# EAGLE board ESC (EAGLE 9.5.1)
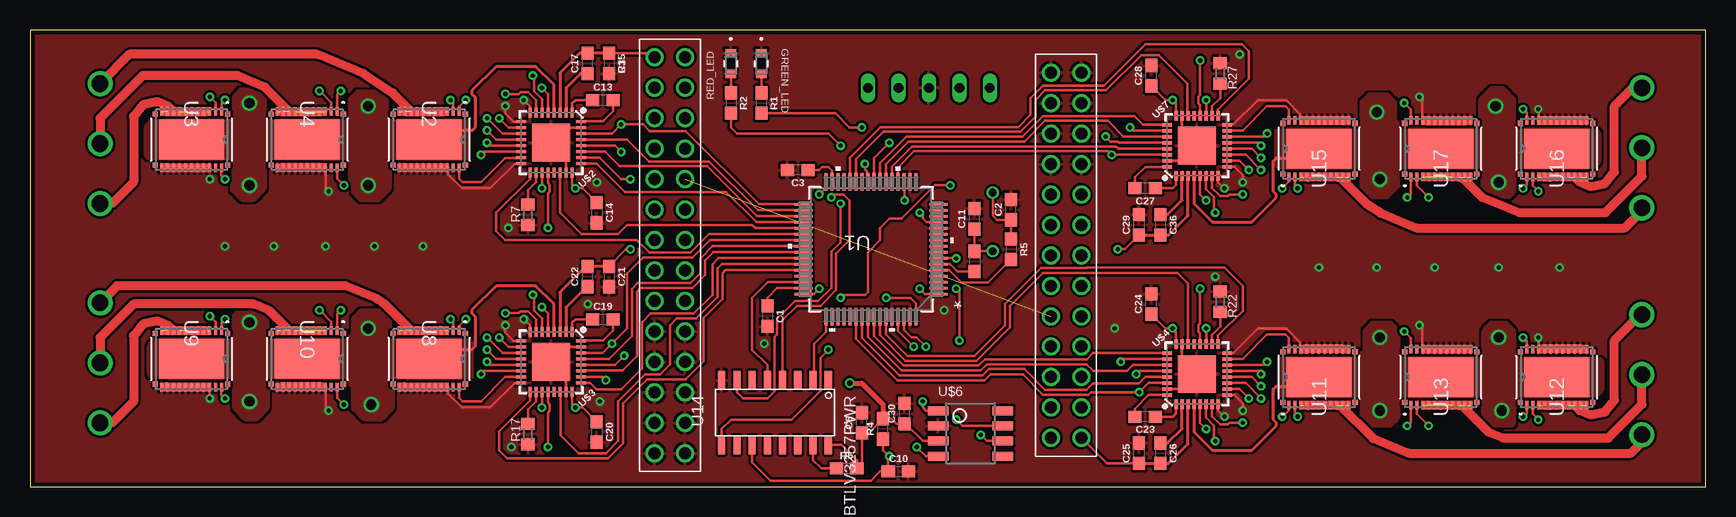
[diagram p0: board, top side]
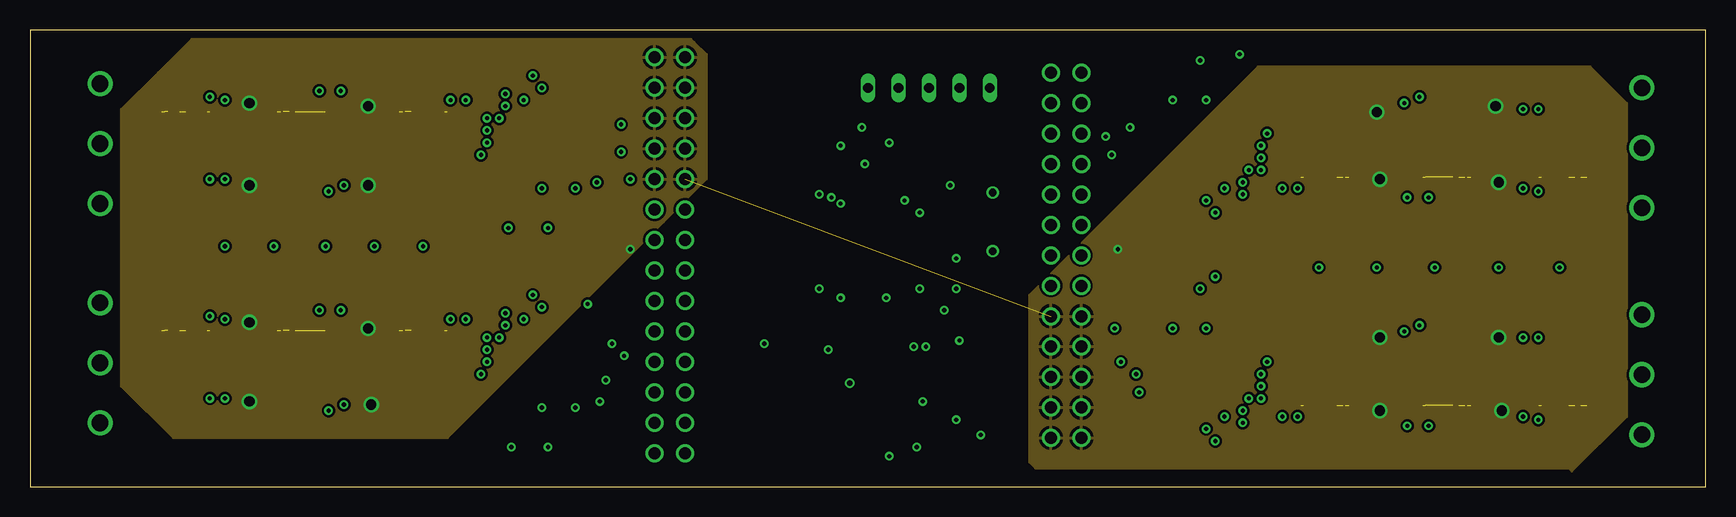
[diagram p1: board, inner layer Route2]
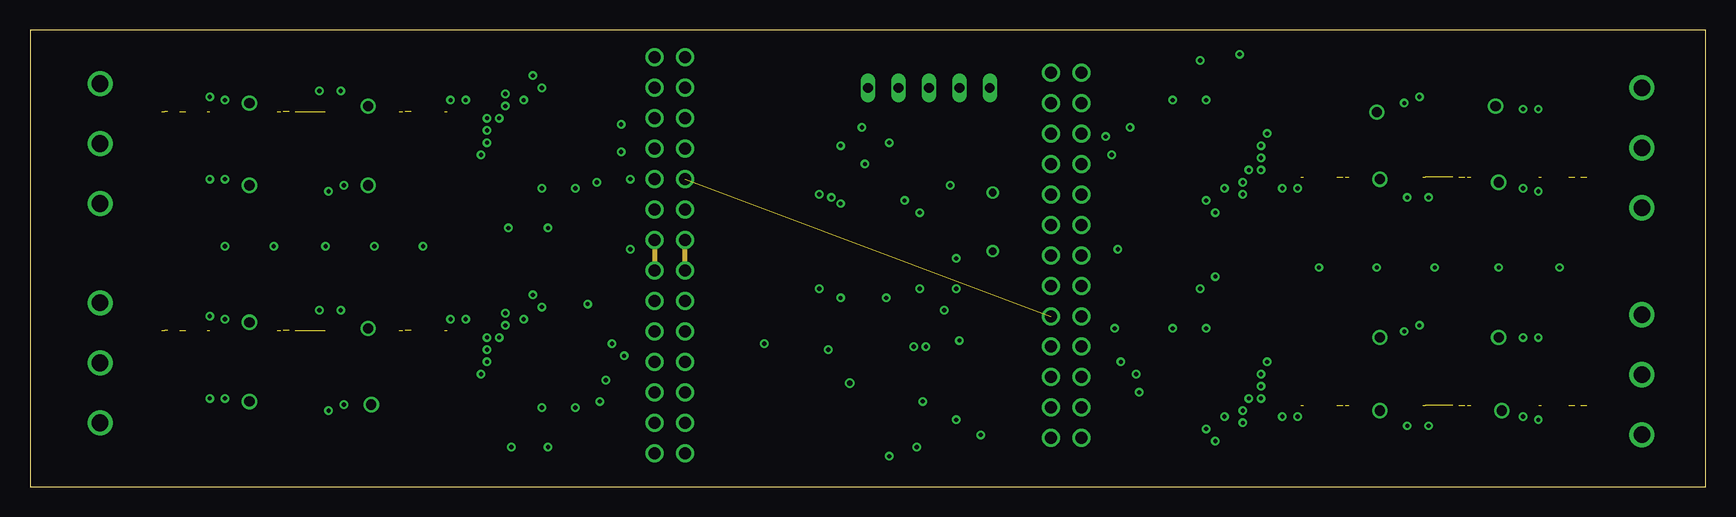
[diagram p2: board, inner layer Route15]
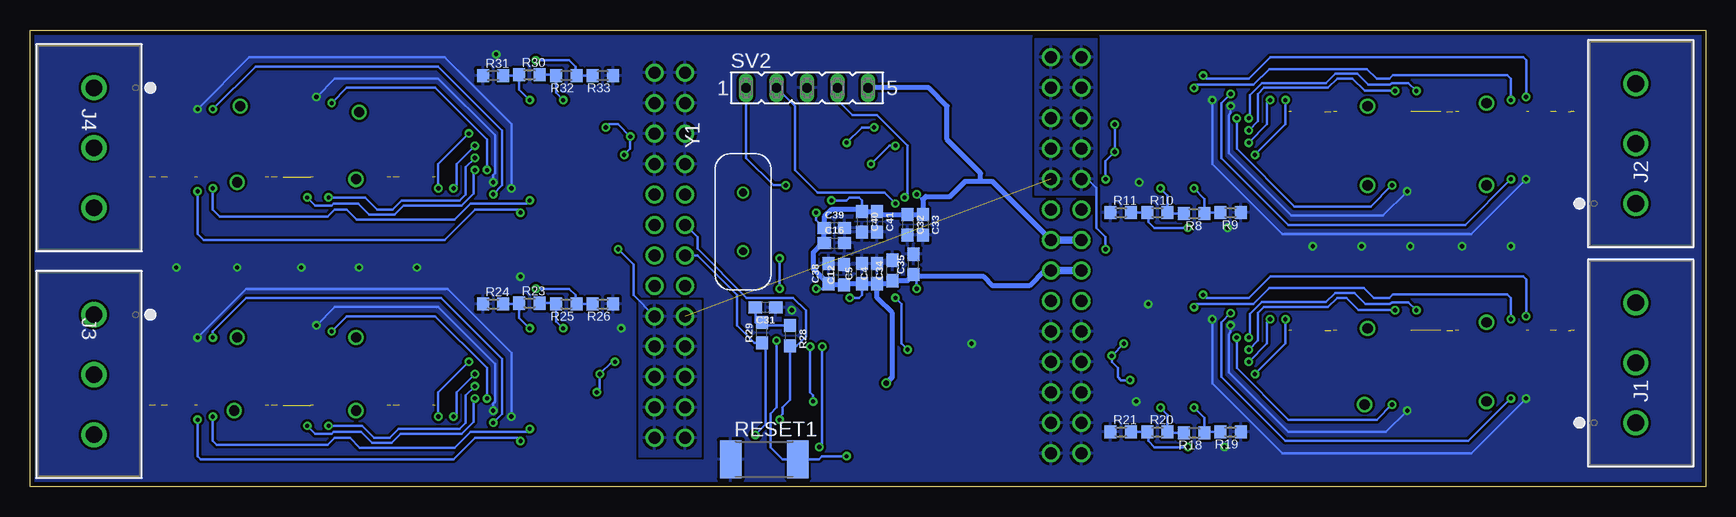
[diagram p3: board, bottom side, seen from below]

Size 139.7 x 38.1 mm. Coordinates in mm from the lower left corner, seen from the top.
Outline: 0,0 139.7,0 139.7,38.1 0,38.1 0,0
Copper layers (1+2*15+16): Top 0.0356mm / dielectric 1.5011mm / Route2 0.0356mm / dielectric 0.1499mm / Route15 0.0356mm / dielectric 0.2007mm / Bottom 0.0356mm
Design rules "ECE_Senior_Design *": minimum track width 8mil, minimum drill 13mil, track to track 8mil, track to pad 8mil, pad to pad 6mil, via to via 8mil, smd to smd 6mil, copper to edge 15mil, drill to drill 8mil, minimum pad ring 7mil, minimum via ring 7mil, stop-mask expansion 3mil, vias tented up to drill 0mil, thermal gap 10mil

## Footprints (pad centres in the part's own frame; a part is rotated, then mirrored left to right if it is on the bottom)
0603 = smd 1.1 x 1: 1 -0.85,0; 2 0.85,0
LED_VISHAY_TLMX1100 = smd 0.66 x 0.889: 1 -0.876,0; 2 0.876,0
CONN_1755529 = drill 1.397 pad 1.905: 1 0,0; 2 5.004,0; 3 10.008,0
R0603 = smd 1 x 1.1: 1 -0.85,0; 2 0.85,0
SW_2512 = smd 1.8 x 3.2: 1 -2.8,0; 2 2.8,0
FE05-1 = drill 0.813 long: 1 -5.08,0; 2 -2.54,0; 3 0,0; 4 2.54,0; 5 5.08,0
LQFP-64 = smd 1.473 x 0.229: 1 -5.626,3.75; 2 -5.626,3.25; 3 -5.626,2.75; 4 -5.626,2.25; 5 -5.626,1.75; 6 -5.626,1.25; 7 -5.626,0.75; 8 -5.626,0.25; 9 -5.626,-0.25; 10 -5.626,-0.75; 11 -5.626,-1.25; 12 -5.626,-1.75; 13 -5.626,-2.25; 14 -5.626,-2.75; 15 -5.626,-3.25; 16 -5.626,-3.75; 33 5.626,-3.75; 34 5.626,-3.25; 35 5.626,-2.75; 36 5.626,-2.25; 37 5.626,-1.75; 38 5.626,-1.25; 39 5.626,-0.75; 40 5.626,-0.25; 41 5.626,0.25; 42 5.626,0.75; 43 5.626,1.25; 44 5.626,1.75; 45 5.626,2.25; 46 5.626,2.75; 47 5.626,3.25; 48 5.626,3.75 | smd 0.229 x 1.473: 17 -3.75,-5.626; 18 -3.25,-5.626; 19 -2.75,-5.626; 20 -2.25,-5.626; 21 -1.75,-5.626; 22 -1.25,-5.626; 23 -0.75,-5.626; 24 -0.25,-5.626; 25 0.25,-5.626; 26 0.75,-5.626; 27 1.25,-5.626; 28 1.75,-5.626; 29 2.25,-5.626; 30 2.75,-5.626; 31 3.25,-5.626; 32 3.75,-5.626; 49 3.75,5.626; 50 3.25,5.626; 51 2.75,5.626; 52 2.25,5.626; 53 1.75,5.626; 54 1.25,5.626; 55 0.75,5.626; 56 0.25,5.626; 57 -0.25,5.626; 58 -0.75,5.626; 59 -1.25,5.626; 60 -1.75,5.626; 61 -2.25,5.626; 62 -2.75,5.626; 63 -3.25,5.626; 64 -3.75,5.626
DMM0022A = smd 0.711 x 0.254: 1 -2.35,2.5; 2 -2.35,2; 3 -2.35,1.5; 4 -2.35,1; 5 -2.35,0.5; 6 -2.35,0; 7 -2.35,-0.5; 8 -2.35,-1; 9 -2.35,-1.5; 10 -2.35,-2; 11 -2.35,-2.5; 12 2.35,-2.5; 13 2.35,-2; 14 2.35,-1.5; 15 2.35,-1; 16 2.35,-0.5; 17 2.35,0; 18 2.35,0.5; 19 2.35,1; 20 2.35,1.5; 21 2.35,2; 22 2.35,2.5 | smd 0.432 x 0.432: 23 -2.115,3.013; 24 -2.115,-3.013; 25 2.115,-3.013; 26 2.115,3.013 | smd 3.302 x 5.41: 27 0,0
SN74CBTLV3257PWR = smd 1.55 x 0.6: P$1 0,0; P$2 0,-1.27; P$3 0,-2.54; P$4 0,-3.81; P$5 0,-5.08; P$6 0,-6.35; P$7 0,-7.62; P$8 0,-8.89; P$9 5.4,-8.89; P$10 5.4,-7.62; P$11 5.4,-6.35; P$12 5.4,-5.08; P$13 5.4,-3.81; P$14 5.4,-2.54; P$15 5.4,-1.27; P$16 5.4,0
QFN-32-5X5MM = smd 0.285 x 0.8: 1 -1.75,-2.5; 2 -1.25,-2.5; 3 -0.75,-2.5; 4 -0.25,-2.5; 5 0.25,-2.5; 6 0.75,-2.5; 7 1.25,-2.5; 8 1.75,-2.5; 17 1.75,2.5; 18 1.25,2.5; 19 0.75,2.5; 20 0.25,2.5; 21 -0.25,2.5; 22 -0.75,2.5; 23 -1.25,2.5; 24 -1.75,2.5 | smd 0.8 x 0.285: 9 2.5,-1.75; 10 2.5,-1.25; 11 2.5,-0.75; 12 2.5,-0.25; 13 2.5,0.25; 14 2.5,0.75; 15 2.5,1.25; 16 2.5,1.75; 25 -2.5,1.75; 26 -2.5,1.25; 27 -2.5,0.75; 28 -2.5,0.25; 29 -2.5,-0.25; 30 -2.5,-0.75; 31 -2.5,-1.25; 32 -2.5,-1.75 | smd 3.15 x 3.15: EP 0,0
ESC2BACKPLANE_WHOLE = drill 1: P$1 1.27,31.75; P$2 3.81,31.75; P$3 6.35,31.75; P$4 8.89,31.75; P$5 11.43,31.75; P$6 13.97,31.75; P$7 16.51,31.75; P$8 19.05,31.75; P$9 21.59,31.75; P$10 24.13,31.75; P$11 26.67,31.75; P$12 29.21,31.75; P$13 31.75,31.75; P$15 1.27,34.29; P$16 3.81,34.29; P$17 6.35,34.29; P$18 8.89,34.29; P$19 11.43,34.29; P$20 13.97,34.29; P$21 16.51,34.29; P$22 19.05,34.29; P$23 21.59,34.29; P$24 24.13,34.29; P$25 26.67,34.29; P$26 29.21,34.29; P$27 31.75,34.29; P$A 0,-1.27; P$AA 30.48,1.27; P$B 2.54,-1.27; P$BB 33.02,1.27; P$C 5.08,-1.27; P$D 7.62,-1.27; P$E 10.16,-1.27; P$F 12.7,-1.27; P$G 15.24,-1.27; P$H 17.78,-1.27; P$I 20.32,-1.27; P$J 22.86,-1.27; P$K 25.4,-1.27; P$L 27.94,-1.27; P$M 30.48,-1.27; P$N 33.02,-1.27; P$O 0,1.27; P$P 2.54,1.27; P$Q 5.08,1.27; P$R 7.62,1.27; P$S 10.16,1.27; P$T 12.7,1.27; P$U 15.24,1.27; P$V 17.78,1.27; P$W 20.32,1.27; P$X 22.86,1.27; P$Y 25.4,1.27; P$Z 27.94,1.27
TCAN337D = smd 1.7 x 0.75: CANH 5.4,2.54; CANL 5.4,1.27; FAULT 5.4,0; GND 0,2.54; RXD 0,0; S 5.4,3.81; TXD 0,3.81; VCC 0,1.27
XTAL_ECS-80-S-4X = drill 0.63 pad 1.03: 1 -2.44,0; 2 2.44,0

## Placement (x,y rotation side)
C1  2.2uF  [0603]  61.47,14.22 270 top
C2  4.7uF  [0603]  81.79,23.11 90 top
C3  2.2uF  [0603]  64.01,26.42 180 top
C4  4.7uF  [0603]  69.09,17.78 90 bottom
C5  4.7uF  [0603]  70.36,17.78 90 bottom
C6  0.1uF  [0603]  69.34,5.33 90 top
C10  4.7uF  [0603]  72.39,1.27 0 top
C11  4.7uF  [0603]  78.74,22.35 90 top
C12  4.7uF  [0603]  71.86,17.68 90 bottom
C13  47nF  [0603]  47.75,32.26 0 top
C14  1.0uF  [0603]  47.24,22.86 270 top
C15  0.1uF  [0603]  48.26,35.31 270 top
C16  4.7uF  [0603]  72.64,20.32 0 bottom
C17  1.0uF  [0603]  46.48,35.31 90 top
C19  47nF  [0603]  47.75,13.97 0 top
C20  1.0uF  [0603]  47.24,4.57 270 top
C21  0.1uF  [0603]  48.26,17.53 270 top
C22  1.0uF  [0603]  46.48,17.53 90 top
C23  47nF  [0603]  92.96,5.84 180 top
C24  1.0uF  [0603]  93.47,15.24 90 top
C25  0.1uF  [0603]  92.46,2.79 90 top
C26  1.0uF  [0603]  94.23,2.79 270 top
C27  47nF  [0603]  92.96,24.89 180 top
C28  1.0uF  [0603]  93.47,34.29 90 top
C29  0.1uF  [0603]  92.46,21.84 90 top
C30  4.7uF  [0603]  72.9,6.1 90 top
C31  0.1uF  [0603]  78.38,14.96 180 bottom
C32  4.7uF  [0603]  66.55,21.84 270 bottom
C33  4.7uF  [0603]  65.28,21.84 270 bottom
C34  4.7uF  [0603]  67.82,18.03 90 bottom
C35  4.7uF  [0603]  66.04,18.54 90 bottom
C36  1.0uF  [0603]  94.23,21.84 270 top
C38  4.7uF  [0603]  73.15,17.78 90 bottom
C39  4.7uF  [0603]  72.64,21.59 0 bottom
C40  4.7uF  [0603]  70.36,22.1 270 bottom
C41  4.7uF  [0603]  69.09,22.1 270 bottom
GREEN_LED  TLMS1100-GS08  [LED_VISHAY_TLMX1100]  60.96,35.31 270 top
J1  1755529  [CONN_1755529]  5.84,5.33 90 bottom
J2  1755529  [CONN_1755529]  5.84,23.62 90 bottom
J3  1755529  [CONN_1755529]  134.37,14.35 270 bottom
J4  1755529  [CONN_1755529]  134.37,33.27 270 bottom
R1  1k  [0603]  60.96,32 270 top
R2  1k  [0603]  58.42,32 270 top
R3  1k  [0603]  78.74,18.8 270 top
R4  1k  [0603]  71.12,4.83 90 top
R5  1k  [0603]  81.79,19.81 270 top
R6  1.5k  [0603]  68.07,1.52 0 top
R7  47k  [R0603]  41.5,22.68 90 top
R8  [R0603]  42.65,22.78 180 bottom
R9  [R0603]  39.62,22.86 180 bottom
R10  [R0603]  45.72,22.86 0 bottom
R11  [R0603]  48.77,22.86 0 bottom
R17  47k  [R0603]  41.5,4.39 90 top
R18  [R0603]  42.65,4.5 180 bottom
R19  [R0603]  39.62,4.57 180 bottom
R20  [R0603]  45.72,4.57 0 bottom
R21  [R0603]  48.77,4.57 0 bottom
R22  47k  [R0603]  99.21,15.42 270 top
R23  [R0603]  98.07,15.32 0 bottom
R24  [R0603]  101.09,15.24 0 bottom
R25  [R0603]  95,15.24 180 bottom
R26  [R0603]  91.95,15.24 180 bottom
R27  47k  [R0603]  99.21,34.47 270 top
R28  60  [0603]  76.33,12.6 270 bottom
R29  60  [0603]  78.69,12.85 90 bottom
R30  [R0603]  98.07,34.37 0 bottom
R31  [R0603]  101.09,34.29 0 bottom
R32  [R0603]  95,34.29 180 bottom
R33  [R0603]  91.95,34.29 180 bottom
RED_LED  TLMS1100-GS08  [LED_VISHAY_TLMX1100]  58.42,35.31 270 top
RESET1  [SW_2512]  78.49,2.29 0 bottom
SV2  [FE05-1]  74.93,33.27 0 bottom
U1  STM32F405RGT6  [LQFP-64]  70.1,19.81 180 top
U2  CSD88584Q5DCT  [DMM0022A]  33.27,28.96 270 top
U3  CSD88584Q5DCT  [DMM0022A]  13.46,28.96 270 top
U4  CSD88584Q5DCT  [DMM0022A]  23.11,28.96 270 top
U8  CSD88584Q5DCT  [DMM0022A]  33.27,10.67 270 top
U9  CSD88584Q5DCT  [DMM0022A]  13.46,10.67 270 top
U10  CSD88584Q5DCT  [DMM0022A]  23.11,10.67 270 top
U11  CSD88584Q5DCT  [DMM0022A]  107.44,9.14 90 top
U12  CSD88584Q5DCT  [DMM0022A]  127.25,9.14 90 top
U13  CSD88584Q5DCT  [DMM0022A]  117.6,9.14 90 top
U14  SN74CBTLV3257PWR  [SN74CBTLV3257PWR]  66.55,8.89 270 top
U15  CSD88584Q5DCT  [DMM0022A]  107.44,28.19 90 top
U16  CSD88584Q5DCT  [DMM0022A]  127.25,28.19 90 top
U17  CSD88584Q5DCT  [DMM0022A]  117.6,28.19 90 top
U$2  DRV8320H  [QFN-32-5X5MM]  43.43,28.7 180 top
U$3  DRV8320H  [QFN-32-5X5MM]  43.43,10.41 180 top
U$4  DRV8320H  [QFN-32-5X5MM]  97.28,9.4 0 top
U$5  ESC2BACKPLANE  [ESC2BACKPLANE_WHOLE]  53.34,35.81 270 top
U$6  TCAN337D  [TCAN337D]  75.69,2.54 0 top
U$7  DRV8320H  [QFN-32-5X5MM]  97.28,28.45 0 top
Y1  ECS-80-S-4X  [XTAL_ECS-80-S-4X]  80.26,22.1 270 bottom

## Library data of the parts
C1 C3 = SparkFun-Capacitors; PROD_ID: CAP-07888
C2 C4 C5 C10-C12 C16 C30 C32-C35 C38-C41 = SparkFun-Capacitors; PROD_ID: CAP-08280
C6 C15 C21 C25 C29 C31 = SparkFun-Capacitors; PROD_ID: CAP-00810
C13 C19 C23 C27 = SparkFun-Capacitors; PROD_ID: CAP-08605
C14 C17 C20 C22 C24 C26 C28 C36 = SparkFun-Capacitors; PROD_ID: CAP-00868
GREEN_LED RED_LED = VESC_SHIT; MANUFACTURER_PART_NUMBER: TLMS1100GS08; VENDOR: Vishay
J1-J4 = VESC_SHIT; MANUFACTURER_PART_NUMBER: 1755529; VENDOR: Phoenix Contact
R1-R5 R28 R29 = SparkFun-Resistors; PROD_ID: RES-07856
R6 = SparkFun-Resistors; PROD_ID: RES-08306
R7-R11 R17-R27 R30-R33 = rcl; SPICEPREFIX: R
RESET1 = DiscreteComponents
SV2 = con-lsta; OC_FARNELL: unknown; OC_NEWARK: unknown
U1 = VESC_SHIT; MANUFACTURER_PART_NUMBER: STM32F405RGT6; VENDOR: STMicroelectronics
U2-U4 U8-U13 U15-U17 = VESC_SHIT; MANUFACTURER_PART_NUMBER: CSD88584Q5DCT; VENDOR: Texas Instruments
U14 = SN74CBTLV3257PWR
U$2-U$4 U$7 = VESC_SHIT
U$5 = ESC_to_Backplane_Connectors
U$6 = PI_Shield_Library
Y1 = ECS-80-S-4X; DESCRIPTION: Crystal 8MHz Series 2-Pin HC-49/U; DIGI-KEY_PART_NUMBER: X1057-ND; DIGI-KEY_PURCHASE_URL: https://www.digikey.com/product-detail/en/ecs-inc/ECS-80-S-4X/X1057-ND/827549?utm_source=snapeda&utm_medium=aggregator&utm_campaign=symbol; MF: ECS International; MP: ECS-80-S-4X; PACKAGE: HC-49/US ECS International

## Nets
+3V3: C4.1 C5.1 C6.1 C12.1 C16.1 C30.1 C32.1 C33.1 C34.1 C35.1 C38.1 C39.1 C40.1 C41.1 R4.2 R6.2 SV2.5 U1.1 U1.13 U1.19 U1.32 U1.48 U1.64 U14.P$16 U$5.P$G U$5.P$H U$5.P$U U$5.P$V U$6.VCC
+12V: C15.1 C17.2 C21.1 C22.2 C25.1 C26.2 C29.1 C36.2 U2.27 U3.27 U4.27 U8.27 U9.27 U10.27 U11.27 U12.27 U13.27 U15.27 U16.27 U17.27 U$2.3 U$2.4 U$3.3 U$3.4 U$4.3 U$4.4 U$5.P$9 U$5.P$10 U$5.P$11 U$5.P$12 U$5.P$13 U$5.P$23 U$5.P$24 U$5.P$25 U$5.P$26 U$5.P$27 U$5.P$A U$5.P$B U$5.P$C U$5.P$D U$5.P$E U$5.P$O U$5.P$P U$5.P$Q U$5.P$R U$5.P$S U$7.3 U$7.4
CAN_H: R28.2 U$5.P$6 U$6.CANH
CAN_L: R29.1 U$5.P$7 U$6.CANL
CAN_RX: U1.61 U$6.RXD
CAN_TX: U1.62 U$6.TXD
DVDD_1: C14.1 R8.2 R10.2 U$2.24
DVDD_2: C20.1 R18.2 R20.2 U$3.24
DVDD_3: C24.1 R23.2 R25.2 U$4.24
DVDD_4: C28.1 R30.2 R32.2 U$7.24
EN_1: U1.37 U$2.22
EN_2: U1.43 U$3.22
EN_3: U1.58 U$4.22
EN_4: U1.27 U$7.22
FAULT_1: U1.38 U$2.17
FAULT_2: U1.44 U$3.17
FAULT_3: U1.59 U$4.17
FAULT_4: U1.28 U$7.17
GHA_1: U3.1 U$2.5
GHA_2: U9.1 U$3.5
GHA_3: U12.1 U$4.5
GHA_4: U16.1 U$7.5
GHB_1: U4.1 U$2.12
GHB_2: U10.1 U$3.12
GHB_3: U13.1 U$4.12
GHB_4: U17.1 U$7.12
GHC_1: U2.1 U$2.13
GHC_2: U8.1 U$3.13
GHC_3: U11.1 U$4.13
GHC_4: U15.1 U$7.13
GLA_1: U3.22 U$2.7
GLA_2: U9.22 U$3.7
GLA_3: U12.22 U$4.7
GLA_4: U16.22 U$7.7
GLB_1: U4.22 U$2.10
GLB_2: U10.22 U$3.10
GLB_3: U13.22 U$4.10
GLB_4: U17.22 U$7.10
GLC_1: U2.22 U$2.15
GLC_2: U8.22 U$3.15
GLC_3: U11.22 U$4.15
GLC_4: U15.22 U$7.15
GND: C1.2 C2.2 C3.2 C4.2 C5.2 C6.2 C10.2 C11.2 C12.2 C14.2 C15.2 C16.2 C20.2 C21.2 C24.2 C25.2 C28.2 C29.2 C30.2 C31.1 C32.2 C33.2 C34.2 C35.2 C38.2 C39.2 C40.2 C41.2 GREEN_LED.1 R7.1 R9.1 R11.1 R17.1 R19.1 R21.1 R22.1 R24.1 R26.1 R27.1 R31.1 R33.1 RED_LED.1 RESET1.1 SV2.3 U1.12 U1.18 U1.60 U1.63 U2.12 U2.13 U2.14 U2.15 U2.16 U2.17 U2.18 U2.19 U2.20 U3.12 U3.13 U3.14 U3.15 U3.16 U3.17 U3.18 U3.19 U3.20 U4.12 U4.13 U4.14 U4.15 U4.16 U4.17 U4.18 U4.19 U4.20 U8.12 U8.13 U8.14 U8.15 U8.16 U8.17 U8.18 U8.19 U8.20 U9.12 U9.13 U9.14 U9.15 U9.16 U9.17 U9.18 U9.19 U9.20 U10.12 U10.13 U10.14 U10.15 U10.16 U10.17 U10.18 U10.19 U10.20 U11.12 U11.13 U11.14 U11.15 U11.16 U11.17 U11.18 U11.19 U11.20 U12.12 U12.13 U12.14 U12.15 U12.16 U12.17 U12.18 U12.19 U12.20 U13.12 U13.13 U13.14 U13.15 U13.16 U13.17 U13.18 U13.19 U13.20 U14.P$8 U15.12 U15.13 U15.14 U15.15 U15.16 U15.17 U15.18 U15.19 U15.20 U16.12 U16.13 U16.14 U16.15 U16.16 U16.17 U16.18 U16.19 U16.20 U17.12 U17.13 U17.14 U17.15 U17.16 U17.17 U17.18 U17.19 U17.20 U$2.8 U$2.9 U$2.16 U$2.23 U$2.31 U$2.EP U$3.8 U$3.9 U$3.16 U$3.23 U$3.31 U$3.EP U$4.8 U$4.9 U$4.16 U$4.23 U$4.31 U$4.EP U$5.P$1 U$5.P$2 U$5.P$3 U$5.P$4 U$5.P$15 U$5.P$16 U$5.P$17 U$5.P$18 U$5.P$AA U$5.P$BB U$5.P$J U$5.P$K U$5.P$L U$5.P$M U$5.P$N U$5.P$X U$5.P$Y U$5.P$Z U$6.GND U$7.8 U$7.9 U$7.16 U$7.23 U$7.31 U$7.EP
INHA_1: U1.36 U$2.25
INHA_2: U1.42 U$3.25
INHA_3: U1.57 U$4.25
INHA_4: U1.23 U$7.25
INHB_1: U1.35 U$2.27
INHB_2: U1.41 U$3.27
INHB_3: U1.56 U$4.27
INHB_4: U1.22 U$7.27
INHC_1: U1.34 U$2.29
INHC_2: U1.40 U$3.29
INHC_3: U1.55 U$4.29
INHC_4: U1.21 U$7.29
INL_1: U1.33 U$2.26 U$2.28 U$2.30
INL_2: U1.39 U$3.26 U$3.28 U$3.30
INL_3: U1.54 U$4.26 U$4.28 U$4.30
INL_4: U1.20 U$7.26 U$7.28 U$7.30
N$1: R1.2 U1.24
N$2: GREEN_LED.2 R1.1
N$3: R2.1 RED_LED.2
N$4: R2.2 U1.25
N$5: C1.1 U1.47
N$6: C3.1 U1.31
N$7: C11.1 R3.1 Y1.2
N$8: C2.1 R5.1 Y1.1
N$9: C13.1 U$2.1
N$10: R6.1 U14.P$15
N$11: R17.2 U$3.18
N$12: R22.2 U$4.18
N$13: R27.2 U$7.18
N$16: C13.2 U$2.32
N$17: R8.1 R9.2 U$2.19
N$18: R7.2 U$2.18
N$19: R10.1 R11.2 U$2.20
N$21: C22.1 U$3.2
N$22: C19.1 U$3.1
N$23: C19.2 U$3.32
N$24: R18.1 R19.2 U$3.19
N$26: R20.1 R21.2 U$3.20
N$27: C26.1 U$4.2
N$28: C23.1 U$4.1
N$29: C23.2 U$4.32
N$30: R23.1 R24.2 U$4.19
N$32: R25.1 R26.2 U$4.20
N$33: C36.1 U$7.2
N$34: C17.1 U$2.2
N$35: C27.1 U$7.1
N$36: C27.2 U$7.32
N$37: R30.1 R31.2 U$7.19
N$39: R32.1 R33.2 U$7.20
N$46: C31.2 R28.1 R29.2
NRST: C10.1 R4.1 RESET1.2 U1.7 U14.P$11
NRST_IN: SV2.1 U14.P$9
OSC_IN: R5.2 U1.5
OSC_OUT: R3.2 U1.6
PHASE_A1: J2.1 U3.3 U3.4 U3.5 U3.6 U3.7 U3.8 U3.9 U3.10 U3.11
PHASE_A2: J1.1 U9.3 U9.4 U9.5 U9.6 U9.7 U9.8 U9.9 U9.10 U9.11
PHASE_A3: J3.1 U12.3 U12.4 U12.5 U12.6 U12.7 U12.8 U12.9 U12.10 U12.11
PHASE_A4: J4.1 U16.3 U16.4 U16.5 U16.6 U16.7 U16.8 U16.9 U16.10 U16.11
PHASE_B1: J2.2 U4.3 U4.4 U4.5 U4.6 U4.7 U4.8 U4.9 U4.10 U4.11
PHASE_B2: J1.2 U10.3 U10.4 U10.5 U10.6 U10.7 U10.8 U10.9 U10.10 U10.11
PHASE_B3: J3.2 U13.3 U13.4 U13.5 U13.6 U13.7 U13.8 U13.9 U13.10 U13.11
PHASE_B4: J4.2 U17.3 U17.4 U17.5 U17.6 U17.7 U17.8 U17.9 U17.10 U17.11
PHASE_C1: J2.3 U2.3 U2.4 U2.5 U2.6 U2.7 U2.8 U2.9 U2.10 U2.11
PHASE_C2: J1.3 U8.3 U8.4 U8.5 U8.6 U8.7 U8.8 U8.9 U8.10 U8.11
PHASE_C3: J3.3 U11.3 U11.4 U11.5 U11.6 U11.7 U11.8 U11.9 U11.10 U11.11
PHASE_C4: J4.3 U15.3 U15.4 U15.5 U15.6 U15.7 U15.8 U15.9 U15.10 U15.11
PROG_SEL: U$5.P$5
S: U14.P$1
SHA_1: U3.2 U$2.6
SHA_2: U9.2 U$3.6
SHA_3: U12.2 U$4.6
SHA_4: U16.2 U$7.6
SHB_1: U4.2 U$2.11
SHB_2: U10.2 U$3.11
SHB_3: U13.2 U$4.11
SHB_4: U17.2 U$7.11
SHC_1: U2.2 U$2.14
SHC_2: U8.2 U$3.14
SHC_3: U11.2 U$4.14
SHC_4: U15.2 U$7.14
SWCLK: U1.49 U14.P$2
SWCLK_IN: SV2.4 U14.P$4
SWDIO: U1.46 U14.P$5
SWDIO_IN: SV2.2 U14.P$7

## Tracks (layer width: path | path; a pad name or v marks a point on that pad's centre or on a via)
+3V3  (via drill 0.35, 0.45)
  Top 0.203: v72.9,23.88 72.9,25.39 U1.19 | v65.79,24.38 66.35,24.95 U1.32 | v65.79,16.51 65.34,16.06 U1.48 | U14.P$16 67.63,3.49 68.92,2.2 R6.2 69.09,1.52 69.34,1.78 C6.1 69.93,4.48 R4.2 71.79,5.68 72.22,5.25 C30.1 72.99,5.25 74.42,3.81 U$6.VCC | U1.64 73.85,15.3 73.41,15.75 v71.37,15.75 | v74.17,22.86 74.42,22.61 74.42,22.35 74.71,22.06 U1.13 | U1.1 74.62,16.06 v74.17,16.51
  Top 0.406: v68.33,8.64 69.34,8.64 71.12,6.86 R4.2
  Route15 0.406: U$5.P$G U$5.P$H | U$5.P$V U$5.P$U
  Bottom 0.203: v65.79,24.38 65.28,23.88 C33.1 | C40.1 70.36,23.88 70.61,24.13 71.37,24.13 71.63,23.88 v72.9,23.88 | C39.1 74.17,22.26 v74.17,22.86 | C5.1 70.36,16 70.61,15.75 v71.37,15.75 | C38.1 73.57,16.51 v74.17,16.51 | C35.1 65.79,17.44 v65.79,16.51
  Bottom 0.406: U$5.P$U 59.52,25.49 60.45,25.49 | 60.45,25.49 61.72,25.49 62.99,24.22 65.02,24.22 65.28,23.96 C33.1 C32.1 68.83,22.69 C41.1 C40.1 70.52,23.11 72.9,23.11 73.49,22.52 C39.1 C16.1 73.66,20.32 74.42,19.56 74.42,18.2 C38.1 73.05,16.83 C12.1 71.75,16.93 C5.1 C4.1 | C4.1 68.07,16.93 C34.1 66.55,17.18 C35.1 65.87,17.53 60.2,17.53 59.44,16.76 56.39,16.76 55.12,18.03 U$5.P$V | v68.33,8.64 67.82,9.14 67.82,14.48 69.09,15.75 C4.1 | 60.45,25.49 60.45,26.16 63.25,28.96 63.25,31.75 64.77,33.27 SV2.5
  Bottom 0.61: U$5.P$G U$5.P$U | U$5.P$V U$5.P$H
+12V  (via drill 0.35, 0.85)  (1 unrouted)
  Top 0.203: C15.1 51.73,36.16 U$5.P$A | v50.04,19.81 49.7,19.81 C21.1 | C29.1 91.27,19.81 v90.68,19.81 | C25.1 89.75,1.94 U$5.P$27
  Top 0.254: C29.1 C36.2 94.91,20.99 96.53,22.62 U$7.3 | U$7.4 97.03,23.62 98.55,22.1 101.85,22.1 103.89,24.13 103.89,24.38 103.63,24.64 103.63,27.18 103.89,27.43 106.68,27.43 U15.27 | C25.1 C26.2 94.91,1.94 96.53,3.57 U$4.3 | U$4.4 97.03,4.57 98.55,3.05 101.85,3.05 103.89,5.08 103.89,5.33 103.63,5.59 103.63,8.13 103.89,8.38 106.68,8.38 U11.27 | C21.1 C22.2 46.32,18.38 44.18,16.24 U$3.3 | U$3.4 43.68,15.24 42.16,16.76 38.86,16.76 36.83,14.73 36.83,14.48 37.08,14.22 37.08,11.68 36.83,11.43 34.04,11.43 U8.27 | C15.1 C17.2 45.81,36.16 44.18,34.53 U$2.3 | U$2.4 43.68,33.53 42.16,35.05 38.86,35.05 36.83,33.02 36.83,32.77 37.08,32.51 37.08,29.97 36.83,29.72 34.04,29.72 U2.27
  Bottom 0.203: v50.04,19.81 50.04,20.83 50.8,21.59 50.8,24.89 51.56,25.65 U$5.P$E | v90.68,19.81 89.41,18.54 89.41,16 U$5.P$23
  other vias: 18.29,25.15 28.19,25.15 28.19,31.75 18.29,32 18.29,13.72 18.29,7.11 28.45,6.86 28.19,13.21 112.52,6.35 122.68,6.35 112.52,12.45 122.43,12.45 112.52,25.65 122.43,25.4 122.17,31.75 112.27,31.24
  pour Bottom: 83.82,2.54 83.82,15.49 88.9,15.49 88.9,2.54
  pour Bottom: 50.8,37.34 55.88,37.34 55.88,24.64 55.88,24.38 50.8,24.38
  pour Route2: 56.39,31.24 56.39,25.65 52.83,22.1 34.8,4.06 12.19,4.06 11.94,4.06 7.62,8.38 7.62,31.5 10.67,34.54 13.46,37.34 51.31,37.34 55.12,37.34 55.37,37.08 56.39,36.07
  pour Route2: 84.07,1.52 128.27,1.52 128.52,1.27 133.1,5.84 133.1,8.13 133.1,32 130.05,35.05 102.36,35.05 83.31,16 83.31,2.03 83.82,1.52
  pour Top (no thermals): 18.54,24.13 17.78,24.13 17.02,24.89 17.02,26.67 16.76,26.92 16.51,26.92 16.26,27.18 10.41,27.18 9.91,27.69 9.91,29.97 10.67,30.73 16.76,30.73 17.27,31.24 17.27,32.51 17.78,33.02 19.05,33.02 19.3,32.77 19.3,31.24 20.07,30.48 26.42,30.48 26.92,30.99 26.92,32.26 27.43,32.77 28.96,32.77 29.46,32.26 29.46,30.99 29.72,30.73 35.81,30.73 36.32,30.23 36.32,27.43 36.07,27.18 29.97,27.18 29.72,26.92 29.72,24.89 28.96,24.13 27.69,24.13 26.92,24.89 26.92,26.67 26.42,27.18 19.81,27.18 19.3,26.67 19.3,24.89
  pour Top (no thermals): 18.8,5.84 18.03,5.84 17.27,6.6 17.27,8.38 17.02,8.64 16.76,8.64 16.51,8.89 10.67,8.89 10.16,9.4 10.16,11.68 10.92,12.45 17.02,12.45 17.02,13.97 17.78,14.73 18.54,14.73 19.56,13.72 19.56,12.95 20.32,12.19 26.67,12.19 27.18,12.7 27.18,13.97 27.69,14.48 29.21,14.48 29.72,13.97 29.72,12.7 29.97,12.45 36.07,12.45 36.58,11.94 36.58,9.14 36.32,8.89 30.23,8.89 29.97,8.64 29.97,6.6 29.21,5.84 27.94,5.84 27.18,6.6 27.18,8.38 26.67,8.89 20.07,8.89 19.56,8.38 19.56,6.6
  pour Top (no thermals): 121.92,33.02 122.68,33.02 123.44,32.26 123.44,30.48 123.7,30.23 123.95,30.23 124.21,29.97 130.05,29.97 130.56,29.46 130.56,27.18 129.79,26.42 123.7,26.42 123.7,24.89 123.19,24.38 121.92,24.38 121.16,25.15 121.16,25.91 120.65,26.42 114.05,26.42 113.79,26.16 113.79,25.15 113.03,24.38 111.76,24.38 111.25,24.89 111.25,25.91 110.74,26.42 104.65,26.42 104.14,26.92 104.14,29.72 104.39,29.97 111,29.97 111.25,30.23 111.25,32 111.76,32.51 113.03,32.51 113.54,32 113.54,30.48 114.05,29.97 120.65,29.97 121.16,30.48 121.16,32.26
  pour Top (no thermals): 121.92,13.46 122.94,13.46 123.7,12.7 123.7,11.43 123.95,11.18 124.21,11.18 124.46,10.92 130.3,10.92 130.81,10.41 130.81,8.13 130.05,7.37 123.95,7.37 123.95,5.84 123.44,5.33 122.17,5.33 121.41,6.1 121.41,6.86 120.9,7.37 114.05,7.37 113.79,7.11 113.79,5.84 113.28,5.33 111.76,5.33 111.25,5.84 111.25,7.11 111,7.37 104.9,7.37 104.39,7.87 104.39,10.67 104.65,10.92 111.25,10.92 111.51,11.18 111.51,12.95 112.01,13.46 113.28,13.46 113.79,12.95 113.79,11.43 114.3,10.92 120.9,10.92 121.41,11.43 121.41,12.95
CAN_H  (via drill 0.35)
  Top 0.203: U$6.CANH 77.72,5.08 v77.22,5.59
  Bottom 0.203: v77.22,5.59 77.22,5.84 76.96,6.1 76.96,6.6 76.33,7.24 R28.2 75.78,11.75 75.01,12.52 75.01,14.68 76.1,15.77 79.96,15.77 84.07,19.88 84.07,20.83 U$5.P$6
CAN_L  (via drill 0.35)
  Top 0.203: U$6.CANL 79.76,3.81 v79.25,4.32
  Bottom 0.203: v79.25,4.32 78.38,5.18 78.38,11.7 R29.1 79.31,12 80.77,13.46 80.77,16 84.07,19.3 U$5.P$7
CAN_RX  (via drill 0.35)
  Top 0.203: U1.61 72.35,12.99 v73.66,11.68 | U$6.RXD 74.68,2.54 v73.91,3.3
  Bottom 0.203: v73.66,11.68 73.66,3.56 v73.91,3.3
CAN_TX  (via drill 0.35)
  Top 0.203: U$6.TXD 74.68,6.35 74.42,6.6 v74.42,7.11 | U1.62 72.85,13.06 73.47,12.45 73.91,12.45 v74.68,11.68
  Bottom 0.203: v74.42,7.11 74.42,7.62 74.68,7.87 v74.68,11.68
DVDD_1  (via drill 0.35)
  Top 0.203: C14.1 46.06,24.89 v45.47,24.89 45.18,25.17 U$2.24
  Bottom 0.203: R8.2 44.79,22.78 R10.2 44.87,24.3 v45.47,24.89
DVDD_2  (via drill 0.35)
  Top 0.203: C20.1 46.06,6.6 v45.47,6.6 45.18,6.89 U$3.24
  Bottom 0.203: R18.2 44.79,4.5 R20.2 44.87,6.01 v45.47,6.6
DVDD_3  (via drill 0.35)
  Top 0.203: C24.1 94.65,13.21 v95.25,13.21 95.53,12.93 U$4.24
  Bottom 0.203: R23.2 95.92,15.32 R25.2 95.85,13.8 v95.25,13.21
DVDD_4  (via drill 0.35)
  Top 0.203: C28.1 94.65,32.26 v95.25,32.26 95.53,31.98 U$7.24
  Bottom 0.203: R30.2 95.92,34.37 R32.2 95.85,32.85 v95.25,32.26
EN_1
  Top 0.203: U$2.22 44.2,26.19 44.2,22.86 45.97,21.08 49.02,21.08 49.78,21.84 60.19,21.84 60.47,21.56 U1.37
EN_2
  Top 0.203: U$3.22 44.24,7.86 44.24,4.28 45.72,2.79 48.01,2.79 49.02,3.81 49.02,7.11 51.27,9.36 52.51,9.36 53.34,10.19 53.34,13.46 53.91,14.03 55.5,14.03 57.3,15.83 57.3,18.19 57.68,18.56 U1.43
EN_3
  Top 0.203: U$4.22 96.53,16.94 95.65,17.82 84.43,17.82 81.69,15.07 81.69,13.29 78.91,10.52 72.98,10.52 70.85,12.64 U1.58
EN_4
  Top 0.203: U$7.22 96.48,31 96.48,33.61 94.1,35.99 92.64,35.99 89.7,33.06 84.62,33.06 83.82,32.26 83.82,30.87 82.56,29.6 71.13,29.6 68.85,27.33 U1.27
FAULT_1
  Top 0.203: U$2.17 41.68,25.68 38.86,22.86 38.86,21.34 39.62,20.57 50.58,20.57 51.63,19.52 55.08,19.52 56.62,21.06 U1.38
FAULT_2
  Top 0.203: U$3.17 41.68,7.21 39.12,4.64 39.12,3.05 39.78,2.39 48.17,2.39 49.43,3.64 49.43,6.94 51.44,8.95 54.64,8.95 56.13,10.45 56.13,14.09 57.71,15.66 57.71,17.78 57.99,18.06 U1.44
FAULT_3
  Top 0.203: U$4.17 99.03,12.61 101.09,14.66 101.09,16.76 99.57,18.29 88.11,18.29 88.07,18.25 84.29,18.25 81.28,15.24 81.28,13.46 78.74,10.92 73.15,10.92 71.35,12.72 U1.59
FAULT_4
  Top 0.203: U$7.17 99.03,31.46 101.6,34.02 101.6,36.32 101.01,36.91 92.98,36.91 89.53,33.47 84.45,33.47 83.41,32.43 83.41,31.04 82.39,30.01 70.91,30.01 68.35,27.46 U1.28
GHA_1  (via drill 0.35)
  Top 0.203: U$2.5 43.18,32.76 v42.67,33.27 | U3.1 15.96,31.96 v16.26,32.26
  Bottom 0.203: v42.67,33.27 42.42,33.53 37.73,33.53 36.41,34.85 28.25,34.85 27.43,34.04 26.4,34.04 26.09,34.34 16.56,34.34 16.26,34.04 v16.26,32.26
GHA_2  (via drill 0.35)
  Top 0.203: U$3.5 43.18,14.47 v42.67,14.99 | U9.1 15.96,13.68 v16.26,13.97
  Bottom 0.203: v42.67,14.99 42.42,15.24 37.73,15.24 36.41,16.56 28.5,16.56 27.69,15.75 26.4,15.75 26.09,16.05 16.56,16.05 16.26,15.75 v16.26,13.97
GHA_3  (via drill 0.35)
  Top 0.203: U$4.5 97.53,5.34 v98.04,4.83 | U12.1 124.75,6.14 v124.46,5.84
  Bottom 0.203: v98.04,4.83 98.3,4.57 102.99,4.57 104.31,3.25 112.22,3.25 113.03,4.06 114.32,4.06 114.88,3.51 124.16,3.51 124.46,3.81 v124.46,5.84
GHA_4  (via drill 0.35)
  Top 0.203: U$7.5 97.53,24.39 v98.04,23.88 | U16.1 124.75,25.19 v124.46,24.89
  Bottom 0.203: v98.04,23.88 98.3,23.62 102.99,23.62 104.31,22.3 112.47,22.3 113.28,23.11 114.32,23.11 114.88,22.56 123.9,22.56 124.46,23.11 v124.46,24.89
GHB_1  (via drill 0.35)
  Top 0.203: U$2.12 38.87,28.95 v38.1,29.72 | v25.91,33.02 25.61,32.72 25.61,32.71 U4.1
  Bottom 0.203: v38.1,29.72 37.34,30.48 37.34,32.77 36.83,33.27 31.5,33.27 30.73,34.04 29.46,34.04 28.45,33.02 v25.91,33.02
GHB_2  (via drill 0.35)
  Top 0.203: v25.91,14.73 25.61,14.43 U10.1 | U$3.12 38.87,10.66 v38.1,11.43
  Bottom 0.203: v38.1,11.43 37.34,12.19 37.34,14.48 36.83,14.99 31.5,14.99 30.73,15.75 29.97,15.75 28.96,14.73 v25.91,14.73
GHB_3  (via drill 0.35)
  Top 0.203: v114.81,5.08 115.11,5.38 115.11,6.02 115.1,6.03 U13.1 | U$4.12 101.85,9.15 v102.62,8.38
  Bottom 0.203: v102.62,8.38 103.38,7.62 103.38,5.33 103.89,4.83 108.97,4.83 109.73,4.06 111,4.06 112.01,5.08 v114.81,5.08
GHB_4  (via drill 0.35)
  Top 0.203: v114.81,24.13 115.11,24.43 U17.1 | U$7.12 101.85,28.2 v102.62,27.43
  Bottom 0.203: v102.62,27.43 103.38,26.67 103.38,24.38 103.89,23.88 108.71,23.88 109.47,23.11 110.74,23.11 111.76,24.13 v114.81,24.13
GHC_1  (via drill 0.35)
  Top 0.203: U$2.13 38.35,28.45 v38.1,28.7 | U2.1 35.77,31.71 v36.32,32.26
  Bottom 0.203: v38.1,28.7 36.58,30.23 36.58,32 v36.32,32.26
GHC_2  (via drill 0.35)
  Top 0.203: U$3.13 38.35,10.16 v38.1,10.41 | U8.1 35.77,13.42 v36.32,13.97
  Bottom 0.203: v38.1,10.41 36.58,11.94 36.58,13.72 v36.32,13.97
GHC_3  (via drill 0.35)
  Top 0.203: U$4.13 102.36,9.65 v102.62,9.4 | U11.1 104.94,6.39 v104.39,5.84
  Bottom 0.203: v102.62,9.4 104.14,7.87 104.14,6.1 v104.39,5.84
GHC_4  (via drill 0.35)
  Top 0.203: U$7.13 102.36,28.7 v102.62,28.45 | U15.1 104.94,25.44 v104.39,24.89
  Bottom 0.203: v102.62,28.45 104.14,26.92 104.14,25.15 v104.39,24.89
GLA_1  (via drill 0.35)
  Top 0.203: U$2.7 42.18,32.24 41.51,32.92 40.88,32.92 40.73,32.77 v39.62,32.77 | v16.26,25.65 15.95,25.96 U3.22
  Bottom 0.203: v39.62,32.77 40.39,32 40.39,27.43 34.8,21.84 20.07,21.84 v16.26,25.65
GLA_2  (via drill 0.35)
  Top 0.203: U$3.7 42.18,13.95 41.51,14.63 40.88,14.63 40.73,14.48 v39.62,14.48 | v16.26,7.37 15.95,7.67 U9.22
  Bottom 0.203: v39.62,14.48 40.39,13.72 40.39,9.14 35.05,3.81 19.81,3.81 v16.26,7.37
GLA_3  (via drill 0.35)
  Top 0.203: U$4.7 98.53,5.86 99.21,5.18 99.84,5.18 99.99,5.33 v101.09,5.33 | v124.46,12.45 124.76,12.14 124.76,11.49 U12.22
  Bottom 0.203: v101.09,5.33 100.33,6.1 100.33,10.67 105.41,15.75 121.67,15.75 124.46,12.95 v124.46,12.45
GLA_4  (via drill 0.35)
  Top 0.203: U$7.7 98.53,24.91 99.21,24.23 99.84,24.23 99.99,24.38 v101.09,24.38 | v124.46,31.5 124.76,31.19 124.76,30.54 U16.22
  Bottom 0.203: v101.09,24.38 100.33,25.15 100.33,29.72 105.66,35.05 120.9,35.05 v124.46,31.5
GLB_1  (via drill 0.35)
  Top 0.203: U$2.10 39.9,29.95 v39.12,30.73 | v26.16,25.15 25.61,25.7 25.61,25.71 U4.22
  Bottom 0.203: v39.12,30.73 39.12,28.19 34.29,23.37 27.94,23.37 v26.16,25.15
GLB_2  (via drill 0.35)
  Top 0.203: U$3.10 39.9,11.66 v39.12,12.45 | v26.16,6.86 25.61,7.41 25.61,7.42 U10.22
  Bottom 0.203: v39.12,12.45 39.12,9.91 34.8,5.59 27.43,5.59 v26.16,6.86
GLB_3  (via drill 0.35)
  Top 0.203: U$4.10 100.82,8.15 v101.6,7.37 | v114.55,12.95 115.11,12.4 115.11,12 115.1,11.99 U13.22
  Bottom 0.203: v101.6,7.37 101.6,9.91 105.92,14.22 113.28,14.22 v114.55,12.95
GLB_4  (via drill 0.35)
  Top 0.203: U$7.10 100.82,27.2 v101.6,26.42 | v114.55,32 115.11,31.45 115.11,31.05 115.1,31.04 U17.22
  Bottom 0.203: v101.6,26.42 101.6,28.96 105.92,33.27 113.28,33.27 v114.55,32
GLC_1
  Top 0.203: U$2.15 40.91,27.43 39.62,27.43 37.59,25.4 36.07,25.4 35.77,25.69 U2.22
GLC_2
  Top 0.203: U$3.15 40.91,9.14 39.62,9.14 37.59,7.11 36.07,7.11 35.77,7.41 U8.22
GLC_3
  Top 0.203: U$4.15 99.8,10.67 101.09,10.67 103.12,12.7 104.65,12.7 104.95,12.4 104.94,12.39 U11.22
GLC_4
  Top 0.203: U$7.15 99.8,29.72 101.09,29.72 103.12,31.75 104.65,31.75 104.95,31.45 104.95,31.05 104.94,31.04 U15.22
GND  (via drill 0.35)
  Top 0.203: U$2.8 41.68,31.72 v41.15,32.26 | v14.99,25.65 14.96,25.68 | U$2.9 40.33,30.45 39.62,31.16 v39.62,31.75 | v24.89,24.64 24.64,24.89 24.64,26.42 24.45,26.61 23.62,26.61 | U$2.16 40.91,26.92 40.39,26.92 38.35,24.89 36,24.89 34.84,26.05 34.84,26.54 | U$3.8 41.68,13.43 v41.15,13.97 | v14.99,7.37 14.96,7.39 U9.20 | U$3.9 40.33,12.16 39.62,12.87 v39.62,13.46 | v24.89,6.35 24.64,6.6 24.64,8.13 24.45,8.32 23.62,8.32 | U$3.16 40.91,8.64 40.39,8.64 38.35,6.6 36,6.6 34.84,7.76 34.84,8.25 U8.20 | U$4.8 99.03,6.38 v99.57,5.84 | v125.73,12.45 125.75,12.42 U12.20 | U$4.9 100.39,7.65 101.09,6.94 v101.09,6.35 | v115.82,13.46 116.08,13.21 116.08,11.68 116.27,11.49 U13.18 | U$4.16 99.81,11.18 100.33,11.18 102.36,13.21 104.72,13.21 105.87,12.05 105.87,11.56 U11.20 | U$7.8 99.03,25.43 v99.57,24.89 | v125.73,31.5 125.75,31.47 U16.20 | U$7.9 100.39,26.7 101.09,25.99 v101.09,25.4 | v115.82,32.51 116.08,32.26 116.08,30.73 116.27,30.54 U17.18 | U$7.16 99.81,30.23 100.33,30.23 102.36,32.26 104.72,32.26 105.87,31.1 105.87,30.61 U15.20 | U$2.31 44.68,29.95 U$2.EP 43.69,28.7 44.7,27.69 44.68,27.67 U$2.23 | U$3.31 44.47,11.66 44.45,11.68 43.43,10.67 U$3.EP 43.69,10.41 44.7,9.4 44.68,9.38 U$3.23 | U$4.31 96.25,8.15 96.27,8.13 97.28,9.14 U$4.EP 97.03,9.4 96.01,10.41 96.03,10.43 U$4.23 | U$7.23 96.03,29.74 96.01,29.72 U$7.EP 96.01,27.18 95.99,27.2 U$7.31
  Top 0.762: 14.75,26.61 U3.13 11.25,26.61 | 20.9,26.61 U4.13 U4.14 U4.15 U4.16 U4.17 U4.18 | 34.56,26.61 U2.13 31.06,26.61 | 24.4,26.61 23.62,26.61 | 14.75,8.32 U9.13 11.25,8.32 | 24.4,8.32 23.62,8.32 U10.13 20.9,8.32 | 34.56,8.32 U8.13 31.06,8.32 | 125.97,11.49 U12.13 129.47,11.49 | 116.31,11.49 U13.18 U13.13 119.81,11.49 | 106.15,11.49 U11.13 109.66,11.49 | 125.97,30.54 U16.13 129.47,30.54 | 116.31,30.54 U17.18 U17.13 119.81,30.54 | 106.15,30.54 U15.13 109.66,30.54
  Bottom 0.203: v41.15,32.26 41.15,26.92 35.31,21.08 19.56,21.08 v14.99,25.65 | v39.62,31.75 39.62,31.16 39.77,31.01 39.77,27.84 34.54,22.61 26.92,22.61 v24.89,24.64 | v41.15,13.97 41.15,8.64 35.31,2.79 19.56,2.79 v14.99,7.37 | v39.62,13.46 39.62,12.87 39.77,12.72 39.77,9.55 34.8,4.57 26.67,4.57 v24.89,6.35 | v99.57,5.84 99.57,11.18 104.9,16.51 121.67,16.51 v125.73,12.45 | v101.09,6.35 101.09,6.94 100.94,7.09 100.94,10.26 105.66,14.99 114.3,14.99 v115.82,13.46 | v99.57,24.89 99.57,30.23 105.16,35.81 121.41,35.81 v125.73,31.5 | v101.09,25.4 101.09,25.99 100.94,26.14 100.94,29.31 105.66,34.04 114.3,34.04 v115.82,32.51
  other vias: 47.5,7.11 47.24,25.4 32.77,20.07 28.7,20.07 24.64,20.07 20.32,20.07 16.26,20.07 107.44,18.29 112.27,18.29 117.09,18.29 122.43,18.29 127.51,18.29 61.21,11.94 46.48,15.24 90.42,13.21 98.81,17.53 100.84,36.07 39.88,21.59 40.13,3.3 76.2,14.73
  pour Top (rank 6): 0,38.1 0,0 139.7,0 139.7,38.1
  pour Bottom (rank 6): 0,0 139.7,0 139.7,38.1 0,38.1
INHA_1
  Top 0.203: U1.36 60.54,22.06 58.01,24.6 49.6,24.6 47.25,26.95 U$2.25
INHA_2
  Top 0.203: U1.42 57.42,19.06 56.9,18.54 56.9,16 55.33,14.44 51.73,14.44 51,13.72 51,9.86 49.28,8.13 47.24,8.13 46.71,8.66 U$3.25
INHA_3
  Top 0.203: U$4.25 88.62,11.15 88.1,10.63 79.6,10.63 79.08,10.11 72.81,10.11 70.35,12.57 U1.57
INHA_4
  Top 0.203: U$7.25 92.77,30.2 92.05,30.93 84.45,30.93 82.72,29.2 73.07,29.2 70.85,26.98 U1.23
INHB_1
  Top 0.203: U$2.27 47.93,27.95 49.15,26.73 56.45,26.73 60.62,22.56 U1.35
INHB_2
  Top 0.203: U$3.27 45.99,9.72 49.41,9.72 50.6,10.91 50.6,16.26 50.91,16.57 55.22,16.57 56.29,17.64 56.29,18.88 56.97,19.56 U1.41
INHB_3
  Top 0.203: U$4.27 91.94,10.15 91.44,9.65 88.65,9.65 88.08,10.22 79.77,10.22 79.25,9.7 72.65,9.7 69.85,12.5 U1.56
INHB_4
  Top 0.203: U$7.27 91.17,29.2 89.84,30.52 84.62,30.52 82.89,28.79 73.24,28.79 71.35,26.9 U1.22
INHC_1
  Top 0.203: U$2.29 49.78,28.96 51.6,27.14 56.61,27.14 60.69,23.06 U1.34
INHC_2
  Top 0.203: U$3.29 48.26,10.66 50.19,12.6 50.19,16.51 50.66,16.98 55.05,16.98 55.88,17.81 55.88,19.05 56.9,20.07 U1.40
INHC_3
  Top 0.203: U$4.29 92.96,9.14 92.46,8.64 88.61,8.64 88.07,8.09 84.62,8.09 82.89,9.82 79.93,9.82 79.41,9.3 72.48,9.3 69.35,12.42 U1.55
INHC_4
  Top 0.203: U$7.29 90.71,28.2 90.52,28.39 73.53,28.39 71.85,26.71 U1.21
INL_1  (via drill 0.35)
  Top 0.203: U1.33 60.77,23.56 54.65,29.68 51.63,29.68 51.09,30.23 v49.28,30.23 48.51,29.46 45.95,29.46 U$2.30 | U$2.28 48.76,28.45 v49.28,27.94 | U$2.26 47.48,27.45 49.28,25.65 v50.04,25.65
  Bottom 0.203: v49.28,30.23 v49.28,27.94 50.04,27.18 v50.04,25.65
INL_2  (via drill 0.35)
  Top 0.203: U1.39 56.7,20.56 55.25,19.11 51.12,19.11 49.78,17.78 49.78,13.21 v48.51,11.94 47.74,11.16 U$3.30 | U$3.28 48.77,10.16 v49.53,10.92 | U$3.26 47.73,9.16 v48.01,8.89
  Bottom 0.203: v48.01,8.89 48.77,8.89 49.02,9.14 49.02,9.91 49.53,10.41 v49.53,10.92 v48.51,11.94
INL_3  (via drill 0.35)
  Top 0.203: U$4.30 93.23,8.65 v92.46,7.87 88.43,7.87 88.23,7.68 84.45,7.68 82.77,9.37 80.06,9.37 79.58,8.89 72.31,8.89 68.85,12.35 U1.54 | U$4.28 92.45,9.65 v92.2,9.4 | U$4.26 91.17,10.65 v90.93,10.41
  Bottom 0.203: v90.93,10.41 91.19,10.41 v92.2,9.4 92.2,8.13 v92.46,7.87
INL_4  (via drill 0.35)
  Top 0.203: U$7.30 94.77,27.69 v90.17,27.69 90.14,27.69 89.84,27.98 73.7,27.98 72.35,26.63 U1.20 | U$7.28 90.78,28.7 90.69,28.79 90.08,28.79 v89.66,29.21 | U$7.26 91.97,29.7 v91.69,29.97
  Bottom 0.203: v91.69,29.97 91.44,30.23 90.68,30.23 v89.66,29.21 89.66,28.19 v90.17,27.69
N$1  (via drill 0.35)
  Top 0.203: U1.24 70.35,27.43 v71.63,28.7 | v69.34,29.97 68.33,29.97 67.14,31.15 R1.2
  Bottom 0.203: v71.63,28.7 70.36,29.97 v69.34,29.97
N$2
  Top 0.203: R1.1 GREEN_LED.2
N$3
  Top 0.203: R2.1 RED_LED.2
N$4  (via drill 0.35)
  Top 0.203: U1.25 69.77,25.52 69.77,26.3 69.6,26.48 v69.6,26.92 | R2.2 58.42,29.97 58.93,29.46 66.55,29.46 v67.56,28.45
  Bottom 0.203: v67.56,28.45 68.07,28.45 v69.6,26.92
N$5
  Top 0.203: C1.1 61.47,15.75 62.28,16.56 U1.47
N$6
  Top 0.203: C3.1 65.79,26.42 66.04,26.67 66.55,26.67 66.85,26.36 U1.31
N$7
  Top 0.203: Y1.2 80.25,19.65 R3.1 C11.1
N$8
  Top 0.203: R5.1 C2.1 80.61,22.26 80.26,22.61 Y1.1
N$9
  Top 0.203: U$2.1 45.18,31.98 45.47,32.26 C13.1
N$10
  Top 0.203: U14.P$15 65.28,2.22 65.97,1.52 R6.1
N$11
  Top 0.203: U$3.18 42.18,7.13 41.5,6.45 R17.2
N$12
  Top 0.203: U$4.18 98.53,12.68 99.21,13.36 R22.2
N$13
  Top 0.203: U$7.18 98.53,31.73 99.21,32.41 R27.2
N$16
  Top 0.203: U$2.32 45.96,30.48 47.75,30.48 48.6,31.33 C13.2
N$17  (via drill 0.35)
  Top 0.203: v42.67,24.89 U$2.19
  Bottom 0.203: R9.2 41.72,22.86 R8.1 41.8,24.02 v42.67,24.89
N$18
  Top 0.203: R7.2 41.5,24.74 42.18,25.42 U$2.18
N$19  (via drill 0.35)
  Top 0.203: v43.18,21.59 43.18,24.47 43.33,24.62 43.33,25.16 43.18,25.31 U$2.20
  Bottom 0.203: R11.2 R10.1 46.48,22.77 46.48,22.1 45.97,21.59 v43.18,21.59
N$21
  Top 0.254: C22.1 46.39,16.68 44.68,14.97 U$3.2
N$22
  Top 0.203: U$3.1 45.18,13.69 45.47,13.97 C19.1
N$23
  Top 0.203: U$3.32 45.96,12.19 47.75,12.19 48.6,13.04 C19.2
N$24  (via drill 0.35)
  Top 0.203: v42.67,6.6 U$3.19
  Bottom 0.203: R19.2 41.72,4.57 R18.1 41.8,5.73 v42.67,6.6
N$26  (via drill 0.35)
  Top 0.203: v43.18,3.3 43.18,6.18 43.33,6.33 43.33,6.88 43.18,7.02 U$3.20
  Bottom 0.203: R21.2 R20.1 46.48,4.48 46.48,3.81 45.97,3.3 v43.18,3.3
N$27
  Top 0.254: C26.1 94.83,3.64 96.03,4.85 U$4.2
N$28
  Top 0.203: U$4.1 95.53,6.12 95.25,5.84 C23.1
N$29
  Top 0.203: C23.2 92.11,6.52 93.25,7.65 U$4.32
N$30  (via drill 0.35)
  Top 0.203: v98.04,13.21 98.04,11.91 U$4.19
  Bottom 0.203: R24.2 99,15.24 R23.1 98.92,14.08 v98.04,13.21
N$32  (via drill 0.35)
  Top 0.203: v97.54,16.51 97.54,13.63 97.39,13.48 97.39,12.94 97.53,12.79 U$4.20
  Bottom 0.203: R26.2 R25.1 94.23,15.33 94.23,16 94.74,16.51 v97.54,16.51
N$33
  Top 0.254: C36.1 94.83,22.69 96.03,23.9 U$7.2
N$34
  Top 0.254: C17.1 45.89,34.46 44.68,33.25 U$2.2
N$35
  Top 0.203: U$7.1 95.53,25.17 95.25,24.89 C27.1
N$36
  Top 0.203: U$7.32 94.75,26.67 92.96,26.67 92.11,25.82 C27.2
N$37  (via drill 0.35)
  Top 0.203: v98.04,32.26 98.04,30.96 U$7.19
  Bottom 0.203: R31.2 99,34.29 R30.1 98.92,33.13 v98.04,32.26
N$39  (via drill 0.35)
  Top 0.203: v97.54,35.56 97.54,32.68 97.39,32.53 97.39,31.99 97.53,31.84 U$7.20
  Bottom 0.203: R33.2 R32.1 94.23,34.38 94.23,35.05 94.74,35.56 v97.54,35.56
N$46
  Bottom 0.203: C31.2 79.23,13.7 R29.2 78.44,13.45 R28.1
NRST  (via drill 0.35)
  Top 0.203: v77.22,19.05 77.2,19.06 U1.7 | U14.P$11 60.2,2.03 61.72,0.51 70.1,0.51 70.87,1.27 C10.1 71.54,2.45 v71.63,2.54 71.12,3.05 R4.1 | v77.22,16.51 77.47,16.26 v77.47,12.19
  Bottom 0.203: v71.63,2.54 73.66,2.54 73.91,2.29 RESET1.2 76.96,2.29 77.97,3.3 77.97,6.1 77.47,6.6 v77.47,12.19 | v77.22,19.05 v77.22,16.51
NRST_IN  (via drill 0.35)
  Top 0.203: v76.71,25.15 75.44,25.15 72.64,22.35 71.63,22.35 70.87,21.59 70.87,20.57 69.85,19.56 69.85,16.26 69.6,16 67.82,16 v67.56,15.75 | U14.P$9 57.66,4.83 58.42,5.59 63.48,5.59 65.88,7.99 65.88,10.77 v66.55,11.43
  Bottom 0.203: SV2.1 80.01,27.43 77.72,25.15 v76.71,25.15 | v67.56,15.75 67.06,15.24 67.06,11.94 v66.55,11.43
OSC_IN
  Top 0.203: R5.2 79.84,17.02 77.66,17.02 76.61,18.06 U1.5
OSC_OUT
  Top 0.203: R3.2 77.3,17.95 76.69,18.56 U1.6
PHASE_A1  (4 unrouted)
  Top 0.762: U3.5 U3.4 14.75,31.31 | 11.71,31.31 U3.9 | 14.29,31.31 U3.5 | U3.5 U3.6 12.19,31.31 U3.9 | U3.7 U3.5 | 11.25,31.31 U3.9 | U3.9 11.54,31.73 10.64,32.1 9.44,31.86 8.64,30.88 8.64,25.4 6.86,23.62 J2.1
PHASE_A2  (4 unrouted)
  Top 0.762: U9.5 U9.4 14.75,13.02 | 11.71,13.02 U9.9 | 14.29,13.02 U9.5 | U9.5 U9.6 12.19,13.02 U9.9 | U9.7 U9.5 | 11.25,13.02 U9.9 | U9.9 11.54,13.44 10.64,13.81 9.44,13.57 8.64,12.59 8.64,7.11 6.86,5.33 J1.1
PHASE_A3  (4 unrouted)
  Top 0.762: U12.5 U12.4 125.97,6.79 | 129.01,6.79 U12.9 | U12.9 U12.6 U12.5 | 126.42,6.79 U12.5 | U12.7 U12.5 | 129.47,6.79 U12.9 | U12.9 129.18,6.37 130.07,6 131.27,6.24 132.08,7.22 132.08,12.19 134.24,14.35 J3.1
PHASE_A4  (4 unrouted)
  Top 0.762: U16.5 U16.4 125.97,25.84 | 129.01,25.84 U16.9 | U16.9 U16.6 U16.5 | 126.42,25.84 U16.5 | U16.7 U16.5 | 129.47,25.84 U16.9 | U16.9 129.18,25.42 130.07,25.05 131.27,25.29 132.08,26.27 132.08,31.75 133.6,33.27 J4.1
PHASE_B1  (8 unrouted)
  Top 0.762: 24.4,31.31 U4.10 20.9,31.31 | U4.9 19.57,33.35 17.3,34.29 9.4,34.29 5.84,30.73 J2.2
PHASE_B2  (8 unrouted)
  Top 0.762: 24.4,13.02 U10.10 20.9,13.02 | U10.9 19.93,14.7 18.63,15.24 8.64,15.24 5.84,12.45 J1.2
PHASE_B3  (8 unrouted)
  Top 0.762: 116.31,6.79 U13.10 119.81,6.79 | U13.9 119.36,6.79 121.58,4.57 122.81,4.06 131.57,4.06 134.37,6.86 J3.2
PHASE_B4  (8 unrouted)
  Top 0.762: 116.31,25.84 U17.10 119.81,25.84 | U17.9 119.36,25.84 121.04,24.16 124.18,22.86 131.32,22.86 134.37,25.91 J4.2
PHASE_C1  (3 unrouted)
  Top 0.762: 31.06,31.31 U2.10 U2.8 U2.7 U2.6 U2.5 | U2.5 U2.4 34.05,31.31 | U2.5 34.56,31.31 | U2.9 30.24,32.84 27.8,34.47 23.95,36.07 8.28,36.07 J2.3
PHASE_C2  (3 unrouted)
  Top 0.762: 31.06,13.02 U8.10 U8.8 U8.7 U8.6 U8.5 | U8.5 U8.4 34.05,13.02 | U8.5 34.56,13.02 | U8.9 29.47,15.32 28.97,15.66 26.29,16.76 7.26,16.76 J1.3
PHASE_C3  (3 unrouted)
  Top 0.762: 109.66,6.79 U11.10 U11.8 U11.7 U11.6 U11.5 | U11.5 U11.4 106.66,6.79 | U11.5 106.15,6.79 | U11.9 109.2,6.79 111.97,4.02 114.93,2.79 133.45,2.79 134.37,3.71 J3.3
PHASE_C4  (3 unrouted)
  Top 0.762: 109.66,25.84 U15.10 U15.8 U15.7 U15.6 U15.5 | U15.5 U15.4 106.66,25.84 | U15.5 106.15,25.84 | U15.9 109.2,25.84 111.5,23.54 112.59,22.82 115.54,21.59 132.94,21.59 134.37,23.01 J4.3
SHA_1  (via drill 0.35)
  Top 0.203: U3.2 15.46,32.04 v14.99,32.51 | U$2.6 42.68,32.33 42.01,33 42.01,34.19 v41.91,34.29
  Bottom 0.203: v41.91,34.29 41.66,34.04 38.1,34.04 36.32,35.81 15.24,35.81 14.99,35.56 v14.99,32.51
SHA_2  (via drill 0.35)
  Top 0.203: U9.2 15.46,13.75 v14.99,14.22 | U$3.6 42.68,14.04 42.01,14.71 42.01,15.9 v41.91,16
  Bottom 0.203: v41.91,16 41.66,15.75 38.1,15.75 36.32,17.53 15.24,17.53 14.99,17.27 v14.99,14.22
SHA_3  (via drill 0.35)
  Top 0.203: U12.2 125.25,6.06 v125.73,5.59 | U$4.6 98.03,5.77 98.7,5.1 98.7,3.91 v98.81,3.81
  Bottom 0.203: v98.81,3.81 99.06,4.06 102.62,4.06 104.39,2.29 125.48,2.29 125.73,2.54 v125.73,5.59
SHA_4  (via drill 0.35)
  Top 0.203: U16.2 125.25,25.11 v125.73,24.64 | U$7.6 98.03,24.82 98.7,24.15 98.7,22.96 v98.81,22.86
  Bottom 0.203: v98.81,22.86 99.06,23.11 102.62,23.11 105.16,20.57 125.22,20.57 125.73,21.08 v125.73,24.64
SHB_1  (via drill 0.35)
  Top 0.203: v24.13,33.02 25.11,32.04 U4.2 | U$2.11 39.38,29.45 v38.1,30.73
  Bottom 0.203: v38.1,30.73 38,30.84 38,32.68 37,33.68 31.66,33.68 30.9,34.44 29.04,34.44 28.13,33.53 26.33,33.53 26.18,33.68 24.79,33.68 v24.13,33.02
SHB_2  (via drill 0.35)
  Top 0.203: v24.13,14.73 25.11,13.75 U10.2 | U$3.11 39.38,11.16 v38.1,12.45
  Bottom 0.203: v38.1,12.45 38,12.55 38,14.39 37,15.39 31.66,15.39 30.9,16.15 29.3,16.15 28.38,15.24 26.33,15.24 26.18,15.39 24.79,15.39 v24.13,14.73
SHB_3  (via drill 0.35)
  Top 0.203: v116.59,5.08 115.6,6.06 U13.2 | U$4.11 101.33,8.65 v102.62,7.37
  Bottom 0.203: v102.62,7.37 102.72,7.26 102.72,5.42 103.72,4.42 108.8,4.42 109.56,3.66 111.17,3.66 112.08,4.57 114.39,4.57 114.54,4.42 115.93,4.42 v116.59,5.08
SHB_4  (via drill 0.35)
  Top 0.203: v116.59,24.13 115.6,25.11 U17.2 | U$7.11 101.33,27.7 v102.62,26.42
  Bottom 0.203: v102.62,26.42 102.72,26.31 102.72,24.47 103.72,23.47 108.54,23.47 109.31,22.71 111.42,22.71 112.33,23.62 114.39,23.62 114.54,23.47 115.93,23.47 v116.59,24.13
SHC_1  (via drill 0.35)
  Top 0.203: U2.2 35.27,32.04 v35.05,32.26 | U$2.14 37.86,27.95 v37.59,27.69
  Bottom 0.203: v37.59,27.69 35.05,30.23 v35.05,32.26
SHC_2  (via drill 0.35)
  Top 0.203: U8.2 35.27,13.75 v35.05,13.97 | U$3.14 37.86,9.66 v37.59,9.4
  Bottom 0.203: v37.59,9.4 35.05,11.94 v35.05,13.97
SHC_3  (via drill 0.35)
  Top 0.203: U11.2 105.44,6.06 v105.66,5.84 | U$4.14 102.86,10.15 v103.12,10.41
  Bottom 0.203: v103.12,10.41 105.66,7.87 v105.66,5.84
SHC_4  (via drill 0.35)
  Top 0.203: U15.2 105.44,25.11 v105.66,24.89 | U$7.14 102.86,29.2 v103.12,29.46
  Bottom 0.203: v103.12,29.46 105.66,26.92 v105.66,24.89
SWCLK
  Top 0.203: U1.49 66.35,12.92 65.34,11.9 65.34,8.95 U14.P$2
SWCLK_IN  (via drill 0.35)
  Top 0.203: v66.8,24.13 67.06,24.38 67.82,24.38 68.33,23.88 68.33,20.57 67.21,19.45 67.21,16.41 65.89,15.09 63.92,15.09 62.74,13.9 U14.P$4
  Bottom 0.203: v66.8,24.13 66.55,24.38 66.55,28.45 69.09,30.99 71.12,30.99 72.39,32.26 SV2.4
SWDIO
  Top 0.203: U14.P$5 61.47,10.16 60.2,11.43 60.2,15.75 61.51,17.06 U1.46
SWDIO_IN  (via drill 0.35)
  Top 0.203: v67.56,23.62 67.56,20.39 66.8,19.62 66.8,16.59 65.7,15.49 63.75,15.49 62.27,14.01 62.27,12.7 62.07,12.5 62.07,7.97 61.47,7.37 59.44,7.37 58.93,7.87 U14.P$7
  Bottom 0.203: v67.56,23.62 68.48,24.54 74.07,24.54 75.95,26.42 75.95,31.75 SV2.2